# Altium PCB infant_temperature_1_solar.PcbDoc
Units mm, origin at the board's own origin, x right, y up, seen from the top; angles counter-clockwise.
Board outline 25 x 25 mm, 2 copper layers (Top Layer, Bottom Layer), stack 0.097 mm thick; 74 components, 46 nets, 237 pads, 55 vias.
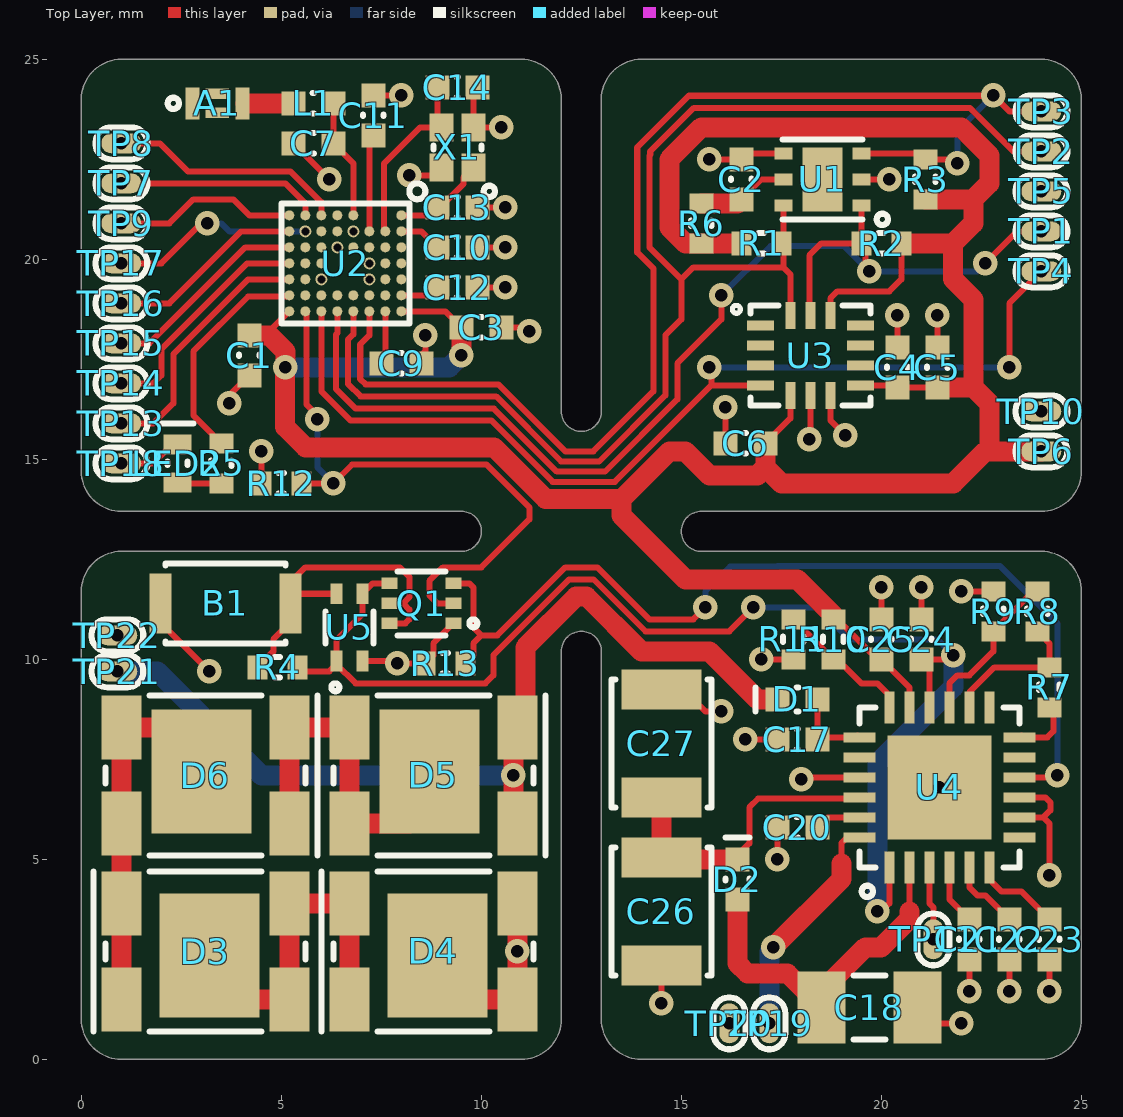
[diagram p0: Top Layer view]
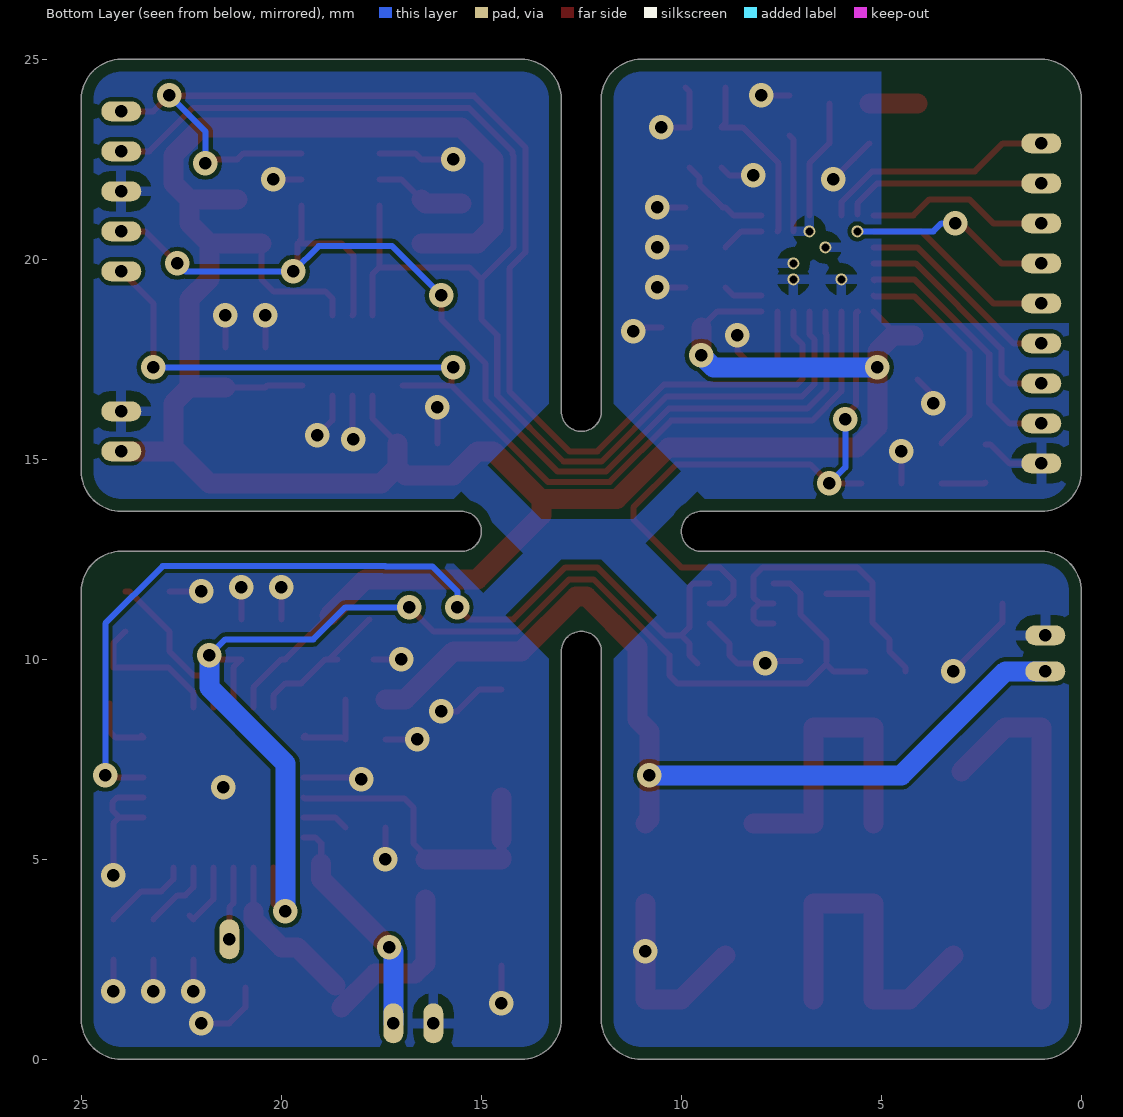
[diagram p1: Bottom Layer view, seen from below]
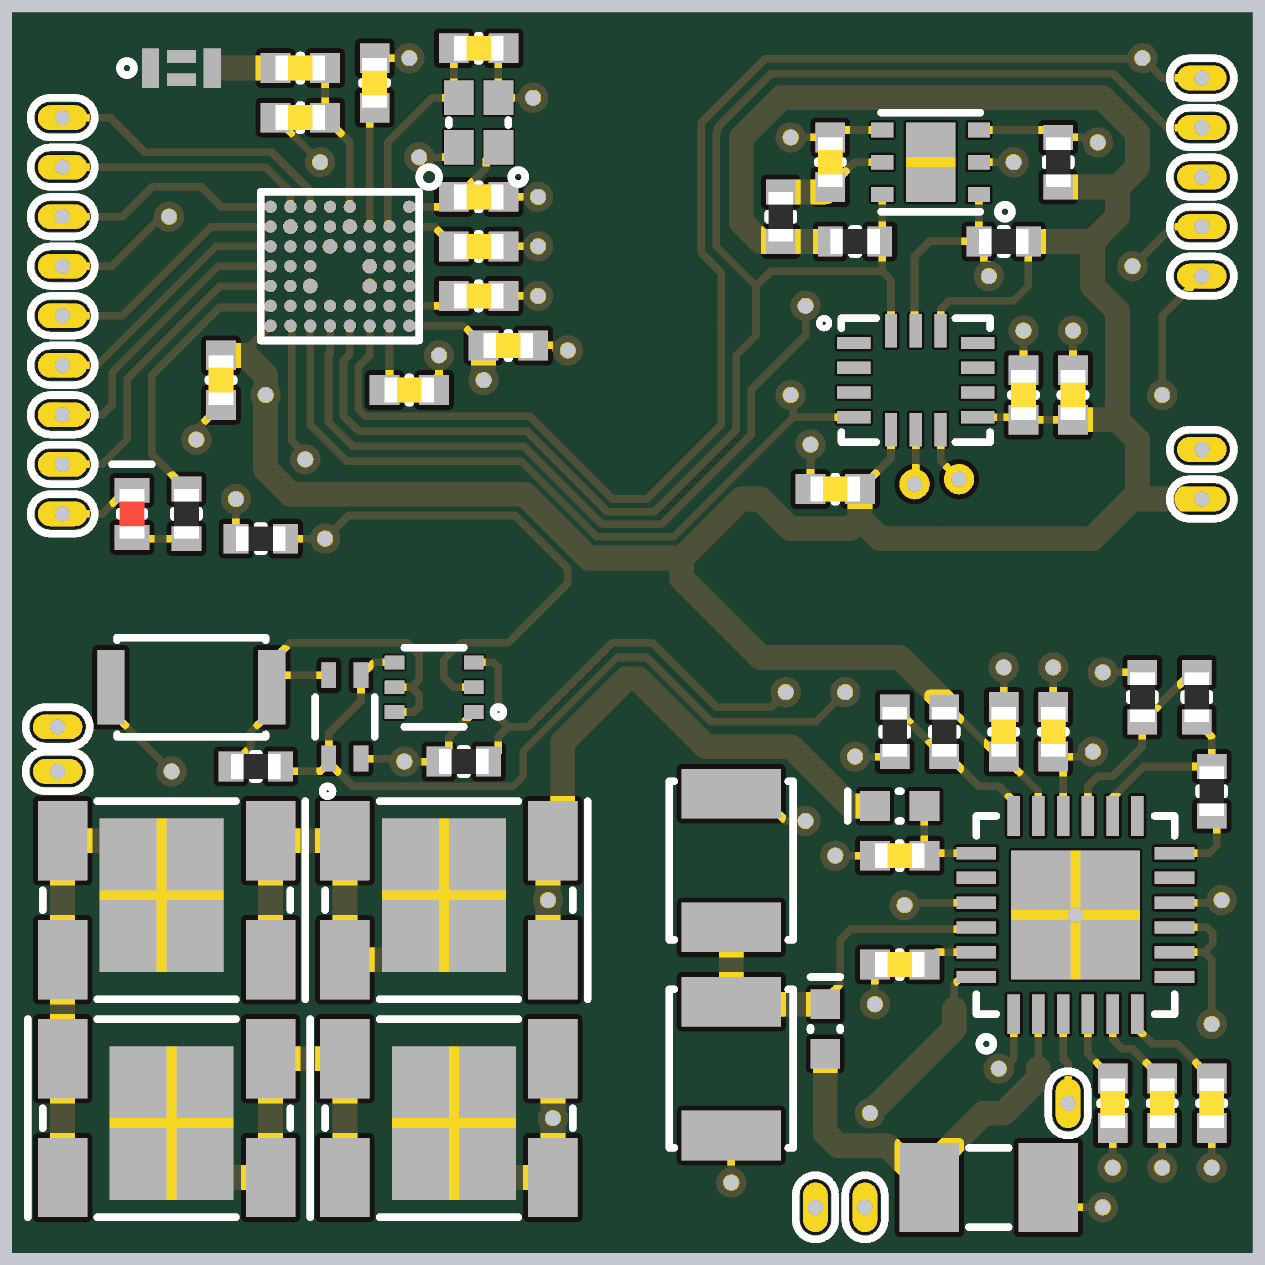
[diagram p2: 3D render of the assembled board from above, using the file's embedded part models]

## Layer stack, top to bottom
Top Solder: solder mask 0.0102, Solder Resist, Dk 3.5
Top Layer: signal copper 0.0356
Dielectric 1: dielectric 0.0254, polyimide, Dk 4.8
Bottom Layer: signal copper 0.0356
Bottom Solder: solder mask 0.0102, Solder Resist, Dk 3.5

## Board outline
0,1 0,11.7 cw(c1,11.7) 1,12.7 9.5,12.7 ccw(c9.5,13.2) 9.5,13.7 1,13.7 cw(c1,14.7) 0,14.7 0,24 cw(c1,24) 1,25 11,25 cw(c11,24) 12,24 12,16.2 ccw(c12.5,16.2) 13,16.2 13,24 cw(c14,24) 14,25 24,25 cw(c24,24) 25,24 25,14.7 cw(c24,14.7) 24,13.7 15.5,13.7 ccw(c15.5,13.2) 15.5,12.7 24,12.7 cw(c24,11.7) 25,11.7 25,1 cw(c24,1) 24,0 14,0 cw(c14,1) 13,1 13,10.2 ccw(c12.5,10.2) 12,10.2 12,1 cw(c11,1) 11,0 1,0 cw(c1,1)

## Design rules (kind name [scope] priority, off if disabled: settings)
BoardOutlineClearance [All] p1: gap=0.305 ignorepadtopadclearanceinfootprint=FALSE
Clearance [All] p1: gap=0.102 ignorepadtopadclearanceinfootprint=FALSE
MinimumSolderMaskSliver [All] p1: minsoldermaskwidth=0.127
PlaneConnect [All] p1: pad.planeconnectstyle=Relief pad.reliefexpansion=0.508 pad.reliefentries=4 pad.reliefconductorwidth=0.254 pad.reliefairgap=0.254 via.planeconnectstyle=Direct via.reliefexpansion=0.508 via.reliefentries=4 via.reliefconductorwidth=0.254 via.reliefairgap=0.254
PolygonConnect [All] p1: thpad.connectstyle=Relief thpad.reliefconductorwidth=0.254 thpad.reliefentries=4 thpad.polygonreliefangle="90 Angle" thpad.airgapwidth=0.254 smdpad.connectstyle=Relief smdpad.reliefconductorwidth=0.254 smdpad.reliefentries=4 smdpad.polygonreliefangle="90 Angle" smdpad.airgapwidth=0.254 via.connectstyle=Direct via.reliefconductorwidth=0.254 via.reliefentries=4 via.polygonreliefangle="90 Angle" via.airgapwidth=0.254
RoomDefinition infant_temperature_solar_power_1 [InComponentClass('infant_temperature_solar_power_1')] p1: confinementstyle=ConfineIn formatcopy=TRUE lockcomponents=FALSE outline -85,-79.3 -34.2,-79.3 -34.2,-53.9 -85,-53.9
RoomDefinition infant_temperature_solar_1 [InComponentClass('infant_temperature_solar_1')] p2: confinementstyle=ConfineIn formatcopy=TRUE lockcomponents=FALSE outline -85,-79.3 -34.2,-79.3 -34.2,-53.9 -85,-53.9
RoutingVias [All] p1: holewidth=0.711 width=1.27 viastyle="Through Hole" minholewidth=0.2 minwidth=0.4 maxholewidth=0.711 maxwidth=1.27
SilkToSolderMaskClearance [IsPad] p1: minsilkscreentomaskgap=0 clearancetoexposedcopper=TRUE
SolderMaskExpansion [All] p1: expansion=0.102
Width [All] p1: maxlimit=0.5 minlimit=0.102 preferedwidth=0.152
27 further rules are at their usual default settings.

## Classes and differential pairs
component class infant_temperature_solar_1: A1 C1 C2 C3 C4 C5 C6 C7 C9 C10 C11 C12 C13 C14 L1 LED2 R1 R2 R3 R5 R6 TP1 TP2 TP3 TP4 TP5 TP6 TP7 TP8 TP9 TP10 TP13 TP14 TP15 TP16 TP17 TP18 U1 U2 U3 X1
component class infant_temperature_solar_power_1: B1 C17 C18 C20 C21 C22 C23 C24 C25 C26 C27 D1 D2 D3 D4 D5 D6 Q1 R4 R7 R8 R9 R10 R11 R12 R13 TP11 TP19 TP20 TP21 TP22 U4 U5

## Components (designator, comment, footprint, x,y, rotation, side; value= is the part's Value field where it differs from the comment)
A1 ".Designator" ANT016008LCS 3.4,23.9 r0 top
B1 ".Designator" KXT3_BUTTON 3.6,11.4 r0 top
C1 ".Designator" C0402 4.2,17.6 r270 top value=100nF
C2 ".Designator" C0402 16.5,22 r90 top value=100nF
C3 ".Designator" C0402 10,18.3 r0 top value=4.7uF
C4 ".Designator" C0402 20.4,17.3 r90 top value=100nF
C5 ".Designator" C0402 21.4,17.3 r90 top value=1uF
C6 ".Designator" C0402 16.6,15.4 r180 top value=100nF
C7 ".Designator" C0402 5.8,22.9 r180 top value=1.0pF
C9 ".Designator" C0402 8,17.4 r0 top value=100nF
C10 ".Designator" C0402 9.4,20.3 r0 top value=100pF
C11 ".Designator" C0402 7.3,23.6 r90 top value=100pF
C12 ".Designator" C0402 9.4,19.3 r0 top value=1uF
C13 ".Designator" C0402 9.4,21.3 r180 top value=4pF
C14 ".Designator" C0402 9.4,24.3 r180 top value=4pF
C17 ".Designator" C0402 17.9,8 r180 top value=10uF
C18 ".Designator" C1206 19.7,1.3 r0 top value=68uF
C20 ".Designator" C0402 17.9,5.8 r180 top value=1uF
C21 ".Designator" C0402 22.2,3 r270 top value=330pF
C22 ".Designator" C0402 23.2,3 r270 top value=330pF
C23 ".Designator" C0402 24.2,3 r270 top value=150pF
C24 ".Designator" C0402 21,10.5 r90 top value=1uF
C25 ".Designator" C0402 20,10.5 r90 top value=1nF
C26 ".Designator" CPH3225A-2K 14.5,3.7 r90 top value=11mF
C27 ".Designator" CPH3225A-2K 14.5,7.9 r270 top value=11mF
D1 ".Designator" D0402 17.9,9 r0 top
D2 ".Designator" D0402 16.4,4.5 r270 top
D3 ".Designator" VEMD5060X01 3.1,2.7 r0 top
D4 ".Designator" VEMD5060X01 8.8,2.7 r0 top
D5 ".Designator" VEMD5060X01 8.8,7.1 r180 top
D6 ".Designator" VEMD5060X01 3.1,7.1 r180 top
L1 ".Designator" L0402 5.8,23.9 r180 top value=3.3nH
LED2 ".Designator" LED_0402 2.4,14.9 r90 top
Q1 ".Designator" SSMini6-F3-B 8.5,11.4 r90 top
R1 ".Designator" R0402 17,20.4 r0 top value=4K99
R2 ".Designator" R0402 20,20.4 r180 top value=4K99
R3 ".Designator" R0402 21.1,22 r90 top value=100K
R4 ".Designator" R0402 4.9,9.8 r0 top value=1M
R5 ".Designator" R0402 3.5,14.9 r270 top value=100
R6 ".Designator" R0402 15.5,20.9 r90 top value=499
R7 ".Designator" R0402 24.2,9.3 r270 top value=1M
R8 ".Designator" R0402 23.9,11.2 r270 top value=226K
R9 ".Designator" R0402 22.8,11.2 r270 top value=1M15
R10 ".Designator" R0402 18.8,10.5 r90 top value=750K
R11 ".Designator" R0402 17.8,10.5 r90 top value=1M
R12 ".Designator" R0402 5,14.4 r0 top value=1M
R13 ".Designator" R0402 9.1,9.9 r0 top value=1M
TP1 ".Designator" TP_32AWG_1X0.5MM_ROUND 24,20.7 r0 top
TP2 ".Designator" TP_32AWG_1X0.5MM_ROUND 24,22.7 r0 top
TP3 ".Designator" TP_32AWG_1X0.5MM_ROUND 24,23.7 r0 top
TP4 ".Designator" TP_32AWG_1X0.5MM_ROUND 24,19.7 r0 top
TP5 ".Designator" TP_32AWG_1X0.5MM_ROUND 24,21.7 r0 top
TP6 ".Designator" TP_32AWG_1X0.5MM_ROUND 24,15.2 r0 top
TP7 ".Designator" TP_32AWG_1X0.5MM_ROUND 1,21.9 r0 top
TP8 ".Designator" TP_32AWG_1X0.5MM_ROUND 1,22.9 r0 top
TP9 ".Designator" TP_32AWG_1X0.5MM_ROUND 1,20.9 r0 top
TP10 ".Designator" TP_32AWG_1X0.5MM_ROUND 24,16.2 r0 top
TP11 "Not A Part" TP_32AWG_1X0.5MM_ROUND 21.3,3 r90 top
TP13 ".Designator" TP_32AWG_1X0.5MM_ROUND 1,15.9 r0 top
TP14 ".Designator" TP_32AWG_1X0.5MM_ROUND 1,16.9 r0 top
TP15 ".Designator" TP_32AWG_1X0.5MM_ROUND 1,17.9 r0 top
TP16 ".Designator" TP_32AWG_1X0.5MM_ROUND 1,18.9 r0 top
TP17 ".Designator" TP_32AWG_1X0.5MM_ROUND 1,19.9 r0 top
TP18 ".Designator" TP_32AWG_1X0.5MM_ROUND 1,14.9 r0 top
TP19 ".Designator" TP_32AWG_1X0.5MM_ROUND 17.2,0.9 r90 top
TP20 ".Designator" TP_32AWG_1X0.5MM_ROUND 16.2,0.9 r90 top
TP21 ".Designator" TP_32AWG_1X0.5MM_ROUND 0.9,9.7 r180 top
TP22 ".Designator" TP_32AWG_1X0.5MM_ROUND 0.9,10.6 r0 top
U1 ".Designator" WSON-6_PAD 18.525,22 r180 top
U2 ".Designator" XFBGA-50 6.6,19.9 r270 top
U3 ".Designator" LGA-14 18.225,17.6 r0 top
U4 ".Designator" VQFN-24_PAD 21.45,6.8 r90 top
U5 ".Designator" SNT-4A 6.7,10.8 r0 top
X1 ".Designator" CRYSTAL_1MM6_X_1MM2 9.4,22.8 r90 top

## Footprints (in the part's own frame and the unit in brackets; to place one, negate y for a bottom-side part, rotate by r counter-clockwise, add the part's x,y. Pads: shape width x height; smd on the part's side, far side on the other; paste and mask are expansions set on the pad)
ANT016008LCS [mm] "1.6 x 0.8 x 0.4mm chip antenna"
  rect 0.35x0.8 smd mask-0.035: 1(-0.625,0) 4(0.625,0)
  rect 0.58x0.26 smd mask+0: 2-3(0,0.235) 5-6(0,-0.235)
  silkscreen extent -1.24,-0.14 -0.96,0.14, body extent -0.8,-0.4 0.8,0.4, height 0.4
C0402 [mm]
  rect 0.6x0.6 smd: 1(-0.5,0) 2(0.5,0)
  silkscreen extent -0.02,-0.25 0.02,0.25, body extent -0.5,-0.25 0.5,0.25, height 0.55
C1206 [mm] "Chip Capacitor; Body 3.2 x 1.8 mm (LxW typ)"
  rect 1.2x1.8 smd: 1(-1.2,0) 2(1.2,0)
  silkscreen extent -0.4,-0.8 0.4,0.8, body extent -1.6,-0.8 1.6,0.8, height 1
CPH3225A-2K [mm] "11mF (EDLC) Supercapacitor 3.3V 1210 (3225 Metric)"
  rect 1x2 smd: 1(-1.35,0) 2(1.35,0)
  silkscreen extent -1.6,-1.25 1.6,1.25, body extent -1.6,-1.25 1.6,1.25, height 0.9
CRYSTAL_1MM6_X_1MM2 [mm] "1.6 x 1.2 x 0.35mm 4-pin crystal"
  rect 0.7x0.6 smd mask+0.036: 1(-0.5,-0.4) 2(0.5,-0.4) 3(0.5,0.4) 4(-0.5,0.4)
  silkscreen extent -1.24,-0.94 0.05,0.6, body extent -0.8,-0.6 0.8,0.6, height 0.35
D0402 [mm] "1.0x0.6x0.5mm for RB751S-40L2"
  rect 0.6x0.6 smd mask+0.09: 1(0.5,0) 2(-0.5,0)
  silkscreen extent -1.05,-0.3 0.03,0.3, body extent -0.5,-0.3 0.5,0.3, height 0.5
KXT3_BUTTON [mm] "For KXT3 line of tactile buttons"
  rect 0.55x1.5 smd: 1(-1.625,0) 2(1.625,0)
  silkscreen extent -1.5,-1 1.5,1, body extent -1.5,-1 1.5,1, height 0.6
L0402 [mm]
  rect 0.6x0.6 smd: 1(-0.5,0) 2(0.5,0)
  silkscreen extent -0.02,-0.25 0.02,0.25, body extent -0.5,-0.25 0.5,0.25, height 0.55
LED_0402 [mm] "0402 w/ LED mark"
  rect 0.5x0.7 smd: 1(0.475,0) 2(-0.475,0)
  silkscreen extent -0.04,-0.4 1,0.4, body extent -0.5,-0.25 0.5,0.25, height 0.35
LGA-14 [mm] "for BMI160, LSM6DS3"
  rect 0.675x0.25 smd mask+0.05: 1(-1.25,0.75) 2(-1.25,0.25) 3(-1.25,-0.25) 4(-1.25,-0.75) 8(1.25,-0.75) 9(1.25,-0.25) 10(1.25,0.25) 11(1.25,0.75)
  rect 0.25x0.675 smd mask+0.05: 5(-0.5,-1) 6(0,-1) 7(0.5,-1) 12(0.5,1) 13(0,1) 14(-0.5,1)
  silkscreen extent -1.95,-1.25 1.5,1.25, body extent -1.5,-1.25 1.5,1.25, height 0.9
R0402 [mm]
  rect 0.5x0.6 smd: 1(-0.5,0) 2(0.5,0)
  silkscreen extent -0.06,-0.25 0.06,0.25, body extent -0.5,-0.25 0.5,0.25, height 0.35
SNT-4A [mm] "4-pin 1.2x1.6x0.5mm for S5712 series Hall Effect Sensors"
  rect 0.3x0.52 smd: 1(-0.325,-0.84) 2(0.325,-0.84) 3(0.325,0.84) 4(-0.325,0.84)
  silkscreen extent -0.6,-1.6 0.6,0.4, body extent -0.6,-0.8 0.6,0.8, height 0.5
SSMini6-F3-B [mm] "1.6 x 1.2mm SMD for NMOS + PMOS array"
  rect 0.28x0.4 smd mask+0.04: 1(-0.5,-0.8) 2(0,-0.8) 3(0.5,-0.8) 4(0.5,0.8) 5(0,0.8) 6(-0.5,0.8)
  silkscreen extent -0.8,-1.4 0.8,0.6
TP_32AWG_1X0.5MM_ROUND [mm] "12mil hole+1 x 0.5mm round pad for 32AWG wire"
  oval 1x0.5 hole 0.305 mask+0.05: 1(0,0)
  silkscreen extent -0.65,-0.4 0.65,0.4
VEMD5060X01 [mm] "5x4x0.9 photodiode/solar cell"
  rect 1x1.6 smd: A(-2.1,-1.2) A(-2.1,1.2) C(2.1,-1.2) C(2.1,1.2)
  rect 2.5x3.1 smd paste-1.25 mask+0: C(0.1,-0.1)
  silkscreen extent -2.8,-2 2.5,2, body extent -2.5,-2 2.5,2, height 0.9
VQFN-24_PAD [mm] "4x4x0.9mm"
  rect 0.8x0.25 smd mask+0.061: 1(-2,1.25) 2(-2,0.75) 3(-2,0.25) 4(-2,-0.25) 5(-2,-0.75) 6(-2,-1.25) 13(2,-1.25) 14(2,-0.75) 15(2,-0.25) 16(2,0.25) 17(2,0.75) 18(2,1.25)
  rect 0.25x0.8 smd mask+0.061: 7(-1.25,-2) 8(-0.75,-2) 9(-0.25,-2) 10(0.25,-2) 11(0.75,-2) 12(1.25,-2) 19(1.25,2) 20(0.75,2) 21(0.25,2) 22(-0.25,2) 23(-0.75,2) 24(-1.25,2)
  rect 2.6x2.6 smd paste-1.3 mask+0.05: PAD(0,0)
  silkscreen extent -2.74,-2 2,2, body extent -2,-2 2,2, height 0.9
WSON-6_PAD [mm] "2x2mm 6pin + power pad"
  rect 0.45x0.3 smd mask+0.05: 1(-0.975,0.65) 2(-0.975,0) 3(-0.975,-0.65) 4(0.975,-0.65) 5(0.975,0) 6(0.975,0.65)
  rect 1x1.6 smd paste-0.5 mask+0.05: PAD(0,0)
  silkscreen extent -1.64,-1 1,1.14, body extent -1.05,-1.05 1.05,1.05, height 0.8
XFBGA-50 [mm] "3x4mm for NRF52832"
  round 0.25 smd paste+0 mask+0.01: A1(-1.2,1.4) A2(-0.8,1.4) A3(-0.4,1.4) A4(0,1.4) A5(0.4,1.4) A6(0.8,1.4) A7(1.2,1.4) B2(-0.8,1) B3(-0.4,1) B4(0,1) B5(0.4,1) B6(0.8,1) B7(1.2,1) C2(-0.8,0.6) C3(-0.4,0.6) C6(0.8,0.6) C7(1.2,0.6) D1(-1.2,0.2) D3(-0.4,0.2) D6(0.8,0.2) D7(1.2,0.2) E1(-1.2,-0.2) E2(-0.8,-0.2) E6(0.8,-0.2) E7(1.2,-0.2) F1(-1.2,-0.6) F2(-0.8,-0.6) F3(-0.4,-0.6) F4(0,-0.6) F6(0.8,-0.6) F7(1.2,-0.6) G1(-1.2,-1) G3(-0.4,-1) G4(0,-1) G5(0.4,-1) G6(0.8,-1) G7(1.2,-1) H1(-1.2,-1.4) H2(-0.8,-1.4) H3(-0.4,-1.4) H4(0,-1.4) H5(0.4,-1.4) H6(0.8,-1.4) H7(1.2,-1.4)
  round 0.3 hole 0.2 paste+0 mask+0.01: C4(0,0.6) C5(0.4,0.6) D2(-0.8,0.2) E3(-0.4,-0.2) F5(0.4,-0.6) G2(-0.8,-1)
  silkscreen extent -2,-1.6 1.5,2, body extent -1.5,-1.6 1.5,1.6, height 0.4

## Part data
A1: library part ANT016008LCS2442MA2, "ANTENNA 2.4GHZ SMD", DigikeyPartNumber=445-172405CT-ND, Manufacturer=TDK, MfgPartNumber=ANT016008LCS2442MA2
B1: library part KXT3_button, "SWITCH TACTILE SPST-NO 0.02A 15V", DigikeyPartNumber=CKN10779CT-ND, Manufacturer=C&K, MfgPartNumber=KXT331LHS
C1 C2 C4 C6 C9: library part CAP, "Nonpolarized capacitor", DigikeyPartNumber=1276-1739-1-ND, Manufacturer=Samsung, MfgPartNumber=CL05F104ZA5NNNC, Package=C0402, VoltageRating=25V
C3: library part CAP, "Nonpolarized capacitor", DigikeyPartNumber=490-14306-1-ND, Manufacturer=Murata, MfgPartNumber=GRM155R61A475MEAAD, Package=C0402, VoltageRating=10V
C5 C12 C20 C24: library part CAP, "Nonpolarized capacitor", DigikeyPartNumber=587-3245-1-ND, Manufacturer="Taiyo Yuden", MfgPartNumber=TMK105BJ105MV-F, Package=C0402, VoltageRating=25V
C7: library part CAP, "Nonpolarized capacitor", DigikeyPartNumber=490-11362-1-ND, Manufacturer=Murata, MfgPartNumber=GRM1555C1E1R0BA01D, Package=C0402, VoltageRating=25V
C10 C11: library part CAP, "Nonpolarized capacitor", DigikeyPartNumber=311-3807-1-ND, Manufacturer=Yageo, MfgPartNumber=CC0402KRX7R8BB101, Package=C0402, VoltageRating=25V
C13 C14: library part CAP, "Nonpolarized capacitor", DigikeyPartNumber=490-5873-1-ND, Manufacturer=Murata, MfgPartNumber=GRM1555C1H4R0CA01D, Package=C0402, VoltageRating=50V, ClassName=MCU
C17: library part CAP, "Nonpolarized capacitor", DigikeyPartNumber=490-13211-1-ND, Manufacturer=Murata, MfgPartNumber=GRJ155R60J106ME11D, Package=C0402, VoltageRating=6.3V
C18: library part CAP, "Nonpolarized capacitor", DigikeyPartNumber=445-11687-1-ND, Manufacturer="TDK Corporation", MfgPartNumber=C3216JB1A686M160AC, Package=C1206, VoltageRating=10V
C21 C22: library part CAP, "Nonpolarized capacitor", DigikeyPartNumber=399-15320-1-ND, Manufacturer=KEMET, MfgPartNumber=C0402C331J3GAC7867, Package=C0402, VoltageRating=25V
C23: library part CAP, "Nonpolarized capacitor", DigikeyPartNumber=490-6171-1-ND, Manufacturer=Murata, MfgPartNumber=GRM1555C1E151JA01D, Package=C0402, VoltageRating=25V
C25: library part CAP, "Nonpolarized capacitor", DigikeyPartNumber=311-1712-1-ND, Manufacturer=Yageo, MfgPartNumber=CC0402KRX7R8BB102, Package=C0402, VoltageRating=25V
C26 C27: library part CPH3225A-2K, "11mF (EDLC) Supercapacitor 3.3V 1210 (3225 Metric)", DigikeyPartNumber=728-1067-1-ND, Manufacturer="Seiko Instruments", Package=1210, VoltageRating=3.3V, MfgPartNumber=CPH3225A-2K
D1 D2: library part RB751S, "Diode Schottky 40V 30mA Surface Mount DFN1006-2", DigikeyPartNumber=RB751S-40L2-TPMSCT-ND, Manufacturer="Micro Commercial Co", MfgPartNumber=RB751S-40L2-TP
D3 D4 D5 D6: library part VEMD5060X01, "PHOTODIODE PIN 820NM SMD", DigikeyPartNumber=VEMD5060X01CT-ND, Manufacturer=Vishay, MfgPartNumber=VEMD5060X01
L1: library part IND, "Inductor", DigikeyPartNumber=490-7641-1-ND, Manufacturer=Murata, MfgPartNumber=LQW15AN3N3B80D, Package=L0402
LED2: library part LED, "LED", Color=Green, DigikeyPartNumber=754-2121-1-ND, Manufacturer=Kingbright, MfgPartNumber=APHHS1005LCGCK, Package=LED_0402
Q1: library part FG6943010R, "MOSFET N/P-CH 30V 0.1A SSMINI6", DigikeyPartNumber=FG6943010RCT-ND, Manufacturer="Panasonic Electronic Components", MfgPartNumber=FG6943010R
R1 R2: library part RES, "Resistor", DigikeyPartNumber=P4.99KLCT-ND, Manufacturer=Panasonic, MfgPartNumber=ERJ-2RKF4991X, Tolerance=1%
R3: library part RES, "Resistor", DigikeyPartNumber=YAG2307CT-ND, Manufacturer=Yageo, MfgPartNumber=RT0402FRE07100KL, Tolerance=1%
R4 R11 R12 R13: library part RES, "Resistor", DigikeyPartNumber=311-1.00MLRCT-ND, Manufacturer=Yageo, MfgPartNumber=RC0402FR-071ML, Tolerance=1%
R5: library part RES, "Resistor", DigikeyPartNumber=311-100DGCT-ND, Manufacturer=Yageo, MfgPartNumber=RC0100FR-07100RL, Tolerance=1%
R6: library part RES, "Resistor", DigikeyPartNumber=P499LCT-ND, Manufacturer=Panasonic, MfgPartNumber=ERJ-2RKF4990X, Tolerance=1%
R7: library part RES, "Resistor", DigikeyPartNumber=Lookup, MfgPartNumber=RC0402FR-071ML, Tolerance=1%, Manufacturer=Lookup
R8: library part RES, "Resistor", DigikeyPartNumber=311-226KLRCT-ND, Manufacturer=Yageo, MfgPartNumber=RC0402FR-07226KL, Tolerance=1%
R9: library part RES, "Resistor", DigikeyPartNumber=541-1.15MLCT-ND, Manufacturer="Vishay Dale", MfgPartNumber=CRCW04021M15FKED, Tolerance=1%
R10: library part RES, "Resistor", DigikeyPartNumber=Lookup, Tolerance=1%, Manufacturer=Lookup, MfgPartNumber=Lookup
TP1 TP2 TP3 TP4 TP5 TP6 TP7 TP8 TP9 TP10 TP11 TP13 TP14 TP15 TP16 TP17 TP18 TP19 TP20 TP21 TP22: library part TP_32AWG, "0.305mm (12mil) hole for 32AWG wire. No BOM item."
U1: library part TMP116, "Temperature Sensor Digital, Local -55°C ~ 125°C 16 b 6-WSON (2x2)", DigikeyPartNumber=296-48306-1-ND, Manufacturer="Texas Instruments", MfgPartNumber=TMP116NAIDRVR
U2: library part NRF52832_BGA, "Bluetooth Low Energy 50-XFBGA", DigikeyPartNumber=1490-1066-1-ND, Manufacturer="Nordic Semiconductor ASA", MfgPartNumber=NRF52832-CIAA-R7
U3: library part BMI160_ALTERNATE, "IMU ACCEL/GYRO I2C/SPI 14LGA", DigikeyPartNumber=828-1057-1-ND, Manufacturer=Bosch, MfgPartNumber=BMI160
U4: library part S6AE103A, "IC PMIC ENERGY HARVESTING 24QFN", DigikeyPartNumber=428-3873-1-ND, Manufacturer=Cypress, MfgPartNumber=S6AE103A0DGN1B200
U5: library part S-5712ANSL2-I4T1U, "Digital Switch Unipolar Switch Open Drain Hall Effect SNT-4A", DigikeyPartNumber=1662-1617-1-ND, Manufacturer=ABLIC, MfgPartNumber=S-5712ANSL2-I4T1U
X1: library part CRYSTAL_32MHz, "CRYSTAL 32.0000MHZ 8PF SMD", DigikeyPartNumber=US3200005ZCT-ND, Manufacturer="Diodes Inc.", MfgPartNumber=US3200005Z, Package=CRYSTAL_1MM6_X_1MM2

## Via types
v1: diameter 0.61, hole 0.305, Top Layer to Bottom Layer, tented both sides, 53 vias
v2: diameter 0.61, hole 0.305, Top Layer to Bottom Layer, 2 vias

## Nets (pads, with @x,y where several pads share a name; then routed paths per layer and width w, separated by ;. In a path a pad name is that pad's centre, name@x,y a point inside that pad or via, vN(x,y) a via of type N, cw(c..) or ccw(c..) an arc to the next point about the centre after c; other vN are vias at no path point)
+2V0: C1.1 C3.1 C4.1 C5.1 C6.1 C25.1 R1.1 R2.1 R3.1 R6.1 R10.2 TP6.1 U2.A7 U2.H7 U3.5 U3.8 U3.12 U4.17 | length 72.2
  Top Layer w0.152: 4.8,18.3 U2.H7 ; U2.A7 9.1,18.7 C3.1 ; C6.1 17.725,16.025 U3.5 ; U3.12 18.725,19.025 18.9,19.2 20.2,19.2 20.5,19.5 R2.1 ; R10.2@18.8,11.1 19.9,10 C25.1 20.7,9.3 U4.17 ; U3.8 20.35,16.85 C4.1 C5.1
  Top Layer w0.5: C1.1 4.7,18.1 5.1,17.7 v1(5.1,17.3) 5.095,17.295 5.095,15.808 5.608,15.295 10.322,15.295 11.607,14.01 13.485,14.01 13.5,13.995 ; v1@9.5,17.8 C3.1 ; R1.1 R6.1 15.1,20.4 14.7,20.8 14.7,22.5 15.5,23.3 22,23.3 22.7,22.6 22.7,21.9 22.3,21.5 ; C6.1 17.1,14.8 ; R10.2@18.8,11.1 17.9,12 15.1,12 13.5,13.6 13.5,13.995 ; R2.1 21.8,20.4 ; R3.1 22.3,21.5 ; C5.1 22.3,16.8 ; 22.7,15.2 22.7,16.4 22.3,16.8 ; TP6.1 22.6,15.2 21.8,14.4 17.5,14.4 17.1,14.8 ; 13.5,13.995 14.705,15.2 15.1,15.2 15.7,14.6 16.9,14.6 17.1,14.8 ; 21.8,20.4 21.795,20.395 21.795,19.505 22.3,19 22.3,16.8 ; 21.8,20.4 22.3,20.9 22.3,21.5
  Bottom Layer w0.5: v1(5.1,17.3) 9.2,17.3 v1(9.5,17.6)
ANT: A1.4 L1.2 | length 1.2
  Top Layer w0.5: A1.4@4.1,23.9 L1.2
ENA_LDO: Q1.3 R13.2 U4.10 | length 24.5
  Top Layer w0.152: Q1.3 9.7,11.9 9.8,11.8 9.8,10.8 10,10.6 ; R13.2 9.8,10.1 9.8,10.4 10,10.6 ; v1(15.6,11.3) 15.3,11 14.2,11 12.9,12.3 12.1,12.3 10.4,10.6 10,10.6 ; U4.10 24.35,7.05 v1(24.4,7.1)
  Bottom Layer w0.152: v1(15.6,11.3) 15.6,11.7 16.219,12.319 17.4,12.319 ; 17.4,12.331 22.969,12.331 24.4,10.9 v1(24.4,7.1)
ENA_LDO_MCU: Q1.2 R12.2 U2.G7 | length 15.6
  Top Layer w0.152: R12.2 v1(6.3,14.4) 6.767,14.867 10.133,14.867 11.2,13.8 11.2,13.5 10,12.3 9.04,12.3 8.7,11.96 8.7,11.6 8.9,11.4 Q1.2 ; U2.G7@5.59,18.69 U2.G7 5.631,18.669 5.631,16.369 6,16 v1(5.9,16)
  Bottom Layer w0.152: v1(5.9,16) 5.9,14.8 v1(6.3,14.4)
GND: B1.1 C1.2 C2.2 C3.2 C4.2 C5.2 C6.2 C7.2 C9.2 C10.2 C11.2 C12.2 C13.1 C14.1 C17.2 C18.2 C20.2 C21.2 C22.2 C23.2 C24.2 C25.2 C26.1 C27.1 D4.C LED2.1 Q1.1 R9.1 R11.1 R12.1 R13.1 TP5.1 TP10.1 TP18.1 TP20.1 TP22.1 U1.2 U1.4 U2.C4 U2.C5 U2.D2 U2.E3 U2.F5 U3.6 U3.7 U4.8 U4.9 U4.21 U4.PAD U5.2 X1.2 X1.4 | length 45.2
  Top Layer w0.152: TP18.1 1.8,14.9 2.275,15.375 LED2.1 ; B1.1 1.975,10.925 v1(3.2,9.7) ; v1@3.7,16.6 C1.2@4.1,17 ; R12.1 v1(4.5,15.2) v1@4.5,15.3 ; C7.2 5.672,22.528 v1(6.2,22) ; U5.2 7.84,9.96 v1(7.9,9.9) R13.1 8.8,10.1 8.8,10.4 Q1.1 ; C11.2 v1(8,24.1) ; v1(8.2,22.1) 8.8,22.1 X1.4 ; C9.2@8.3,17.4 8.6,17.7 v1(8.6,18.1) ; C12.2 v1(10.6,19.3) ; C10.2 v1(10.6,20.3) ; C13.1 v1(10.6,21.3) ; C14.1 9.8,24.2 X1.2 v1(10.5,23.3) ; C3.2 v1@11.2,18.3 ; v1(14.5,1.4) C26.1 ; C27.1 15.05,9.25 15.6,8.7 v1(16,8.7) ; v1(15.7,22.5) C2.2 16.65,22.65 U1.4 ; C6.2 v1(16.1,16.3) ; v1(16.6,8) C17.2 ; v1(17,10) R11.1@17.7,10 ; v1(17.4,5) C20.2 ; v1(18,7) 18.05,7.05 U4.21 ; v2(18.2,15.5) 18.225,15.525 U3.6 ; U3.7 18.725,15.975 v2(19.1,15.6) ; U1.2 v1(20.2,22) ; C25.2 v1(20,11.8) ; C4.2 v1(20.4,18.6) ; C18.2@20.9,1.8 C18.2 21.3,0.9 v1(22,0.9) ; C24.2 v1(21,11.8) ; C5.2 v1(21.4,18.6) ; v1(22,11.7) R9.1 ; v1@22.2,1.6 C21.2 ; v1@23.2,1.6 C22.2 ; U4.8 24.05,6.05 ; U4.9 24.1,6.55 24.225,6.425 24.225,6.225 24.05,6.05 ; v1(24.2,1.7) C23.2 ; v1(24.2,4.6) 24.2,5.9 24.05,6.05
  Top Layer w0.5: D4.C@8.9,2.6 10,1.5 10.9,1.5 v1(10.9,2.7) D4.C@10.9,3.9
  other v1: 22.2,1.7 23.2,1.7 21.45,6.8 3.7,16.4 11.2,18.2
I2C_SCK: R2.2 TP1.1 U1.1 U2.E7 U3.13 | length 29
  Top Layer w0.152: U2.E7 6.4,18.155 6.369,18.124 6.369,16.756 6.856,16.269 10.313,16.269 11.89,14.692 13.092,14.692 14.9,16.5 14.9,17.4 16,18.5 v1(16,19.1) ; U3.13 18.2,18.625 18.2,20.1 18.5,20.4 19.6,20.4 19.6,19.8 v1(19.7,19.7) ; U1.1 19.5,20.5 R2.2@19.55,20.45 ; v1(22.6,19.9) 23.4,20.7 TP1.1
  Bottom Layer w0.152: v1(16,19.1) 17.231,20.331 19.069,20.331 v1(19.7,19.7) 22.4,19.7 v1(22.6,19.9)
I2C_SDA: R1.2 TP2.1 U1.6 U2.D7 U3.14 | length 34.1
  Top Layer w0.152: U2.D7 6.8,18.128 6.671,17.999 6.671,16.881 6.981,16.571 10.369,16.571 11.995,14.946 12.946,14.946 14.602,16.602 14.602,18.102 15,18.5 15,19.5 ; U1.6 17.55,19.8 ; U3.14 17.725,19.625 17.55,19.8 ; TP2.1 23.3,22.7 22.213,23.787 15.313,23.787 14.224,22.697 14.224,22.624 14.2,22.6 14.2,20.3 15,19.5 ; 15,19.5 15.3,19.8 17.55,19.8
INT_IMU: TP4.1 U2.F7 U3.4 | length 25.7
  Top Layer w0.152: U2.F7 6,16.697 6.731,15.967 10.256,15.967 11.784,14.438 13.338,14.438 15.75,16.85 ; v1(15.7,17.3) 15.75,17.25 15.75,16.85 ; U3.4 15.75,16.85 ; v1(23.2,17.3) 23.2,18.9 TP4.1
  Bottom Layer w0.152: v1(15.7,17.3) v1(23.2,17.3) v1@23.2,17.2
INT_TMP: R3.2 TP3.1 U1.3 U2.C7 | length 32
  Top Layer w0.152: U2.C7 7.2,18.1 6.974,17.874 6.974,17.006 7.106,16.874 10.426,16.874 12.1,15.2 12.8,15.2 14.3,16.7 14.3,19.772 14.075,19.998 13.898,20.175 13.898,22.799 15.188,24.089 v1@22.517,24.089 ; U1.3 20.95,22.65 R3.2 22,22.5 v1(21.9,22.4) ; v1(22.8,24.1) 23.2,23.7 TP3.1
  Bottom Layer w0.152: v1(21.9,22.4) 21.9,23.2 v1(22.8,24.1)
LED1_G: R5.1 U2.H6 | length 5.6
  Top Layer w0.152: R5.1 2.8,16.1 2.8,17.7 4.167,19.067 5.167,19.067 U2.H6
NetB1_2: B1.2 Q1.5 Q1.6 R4.1 U5.4 | length 9
  Top Layer w0.152: R4.1@4.4,9.7 R4.1 4.8,10.2 4.8,10.5 5.225,10.925 B1.2 B1.2@5.225,11.6 ; U5.4 5.265,11.64 B1.2@5.225,11.6 ; Q1.6 8.1,10.9 8.2,11 8.2,11.245 8.045,11.4 ; Q1.5 8.045,11.4 ; B1.2@5.225,11.6 5.225,11.925 5.6,12.3 7.96,12.3 8.2,12.06 8.2,11.555 8.045,11.4
NetC2_1: C2.1 R6.2 U1.5 | length 2.3
  Top Layer w0.152: C2.1 17,22 U1.5
  Top Layer w0.5: R6.2 16.4,21.4 C2.1
NetC7_1: C7.1 L1.1 U2.D1 | length 3
  Top Layer w0.152: L1.1 C7.1 6.8,22.4 U2.D1
NetC9_1: C9.1 U2.B7 | length 1.3
  Top Layer w0.152: C9.1 7.6,17.5 U2.B7
NetC10_1: C10.1 U2.A2 | length 1.1
  Top Layer w0.152: U2.A2 8.5,20.7 C10.1
NetC11_1: C11.1 U2.C2 | length 2.4
  Top Layer w0.152: U2.C2 7.2,23 C11.1
NetC12_1: C12.1 U2.A6 | length 1
  Top Layer w0.152: U2.A6 8.7,19.1 C12.1
NetC13_2: C13.2 U2.A1 X1.1 | length 2.4
  Top Layer w0.152: U2.A1 8.7,21.1 C13.2 8.97,21.3 9.55,21.88 9.55,22.05 X1.1
NetC14_2: C14.2 U2.B2 X1.3 | length 4.6
  Top Layer w0.152: U2.B2 7.569,20.731 7.569,22.4 8.469,23.3 X1.3 8.9,23.4 C14.2
NetC17_1: C17.1 D1.1 U4.19 | length 2.1
  Top Layer w0.152: D1.1 C17.1 18.45,8.05 U4.19 U4.19@19.4,8.1
NetC21_1: C21.1 U4.4 | length 1.6
  Top Layer w0.152: U4.4 21.7,4 C21.1 C21.1@22.3,3.6
NetC22_1: C22.1 U4.5 | length 1.8
  Top Layer w0.152: U4.5 22.2,4.3 22.4,4.1 22.6,4.1 C22.1
NetC23_1: C23.1 U4.6 | length 2.2
  Top Layer w0.152: U4.6 22.7,4.5 23,4.2 23.5,4.2 C23.1
NetD3_A: D3.A D6.C | length 9.3
  Top Layer w0.5: D3.A@1,1.5 1,3.9 1,5.9 1,8.3 1.9,8.3 D6.C@3,7.2
NetD3_C: D3.C D4.A | length 8.8
  Top Layer w0.5: D3.C@3.2,2.6 4.3,1.5 5.2,1.5 5.2,3.9 6.7,3.9 D4.A@6.7,1.5
NetD5_C: D5.C D6.A | length 7.8
  Top Layer w0.5: D6.A@5.2,5.9 5.2,8.3 6.7,8.3 6.7,5.9 D5.C@8.2,5.9
NetLED2_2: LED2.2 R5.2 | length 1.1
  Top Layer w0.152: LED2.2 2.425,14.4 R5.2
NetR7_1: R7.1 R8.2 U4.14 | length 3.7
  Top Layer w0.152: U4.14 22.2,9.172 22.828,9.8 R7.1 24.2,10.4 R8.2
NetR7_2: R7.2 U4.12 | length 1.7
  Top Layer w0.152: U4.12@23.5,8.1 U4.12 24.15,8.05 24.3,8.2 R7.2@24.3,8.9
NetR8_1: R8.1 R9.2 U4.15 | length 4
  Top Layer w0.152: U4.15 21.7,9.4 21.9,9.6 22.2,9.6 22.8,10.2 R9.2 23.8,11.7 R8.1
NetR10_1: R10.1 R11.2 U4.18 | length 3.7
  Top Layer w0.152: R11.2 R10.1 ; R10.1@18.6,10 18.9,10 19.5,9.4 19.9,9.4 20.2,9.1 U4.18
PRO_CLK: TP8.1 U2.F1 | length 5.9
  Top Layer w0.152: TP8.1 1.962,22.9 2.662,22.2 5.228,22.2 6,21.428 U2.F1
PRO_DIO: TP7.1 U2.G1 | length 5.1
  Top Layer w0.152: TP7.1 2.534,21.9 2.537,21.898 5.102,21.898 5.6,21.4 U2.G1@5.6,21.126
PRO_R\S\T\: TP9.1 U2.H1 | length 4.6
  Top Layer w0.152: TP9.1 2.2,20.9 2.8,21.5 3.8,21.5 4.2,21.1 U2.H1
TRACE_0: TP16.1 U2.H2 | length 4.9
  Top Layer w0.152: TP16.1 2.2,18.9 4,20.7 U2.H2
TRACE_1: TP15.1 U2.H3 | length 5.2
  Top Layer w0.152: TP15.1 1.7,17.9 4.1,20.3 U2.H3
TRACE_2: TP14.1 U2.H4 | length 5.8
  Top Layer w0.152: TP14.1 1.8,16.9 2,17.1 2,17.755 4.145,19.9 U2.H4
TRACE_3: TP13.1 U2.H5 | length 6.5
  Top Layer w0.152: TP13.1 1.8,15.9 2.302,16.402 2.302,17.63 4.172,19.5 U2.H5 U2.H5@5.167,19.467
TRACE_CLK: TP17.1 U2.G2 | length 5.1
  Top Layer w0.152: TP17.1 2,19.9 3,20.9 v1(3.15,20.9)
  Bottom Layer w0.152: v1(3.15,20.9) 3.5,20.9 3.7,20.7 U2.G2
VBAT: TP19.1 U4.24 | length 5.8
  Top Layer w0.152: 19.002,4.9 19.002,5.402 19.15,5.55 U4.24
  Top Layer w0.5: v1(17.3,2.8) 19.002,4.502 19.002,4.9
  Bottom Layer w0.5: TP19.1 17.2,2.7 v1(17.3,2.8)
VINT: C20.1 U4.23 | length 1.2
  Top Layer w0.152: C20.1 18.65,6.05 U4.23
VOUT1: C24.1 Q1.4 R4.2 U4.1 U4.16 U5.1 U5.3 | length 32.6
  Top Layer w0.152: R4.2@5.4,9.7 6.2,9.7 6.375,9.875 6.375,9.88 6.855,9.4 10.1,9.4 10.3,9.6 10.3,10.105 12.195,12 12.805,12 14.105,10.7 16.2,10.7 v1(16.8,11.3) ; U5.1 6.375,10.475 7.025,11.125 U5.3 7.285,11.9 Q1.4 ; v1@20,3.7 20.2,3.9 U4.1 ; U4.16 21.2,9.8 C24.1 21.7,10 v1(21.8,10.1)
  Bottom Layer w0.152: v1(16.8,11.3) 18.4,11.3 19.2,10.5 21.4,10.5 v1(21.8,10.1)
  Bottom Layer w0.5: v1(19.9,3.7) 19.9,7.4 21.8,9.3 v1(21.8,10.1)
VOUT2: TP11.1 U4.3 | length 2
  Top Layer w0.152: U4.3 21.2,3.9 21.3,3.8 TP11.1@21.3,2.8
VSOLAR: D1.2 D5.A TP21.1 | length 23.4
  Top Layer w0.5: D5.A@10.9,5.9 10.8,6 v1(10.8,7.1) 10.8,8.2 10.9,8.3 11.1,8.5 11.1,10.3 12.372,11.572 12.628,11.572 14,10.2 15.7,10.2 16.9,9 D1.2
  Bottom Layer w0.5: TP21.1 1.9,9.7 4.5,7.1 v1(10.8,7.1)
VSTORE1: C18.1 D2.1 U4.2 | length 8.2
  Top Layer w0.152: 20.7,3.7 U4.2
  Top Layer w0.5: D2.1 16.4,2.4 16.657,2.143 17.657,2.143 C18.1 ; C18.1@18.65,1.85 19.6,2.8 19.997,2.8 20.7,3.503 20.7,3.7
VSTORE2: C26.2 C27.2 D2.2 U4.22 | length 7.2
  Top Layer w0.152: D2.2@16.4,5.1 16.7,5.4 16.7,6.3 16.917,6.517 17.8,6.517 19.417,6.517 U4.22
  Top Layer w0.5: C26.2 14.5,5 D2.2 ; C26.2@14.5,5.501 C27.2
pads on no net: A1.1 A1.2-3 A1.5-6 U1.PAD U2.A3 U2.A4 U2.A5 U2.B3 U2.B4 U2.B5 U2.B6 U2.C3 U2.C6 U2.D3 U2.D6 U2.E1 U2.E2 U2.E6 U2.F2 U2.F3 U2.F4 U2.F6 U2.G3 U2.G4 U2.G5 U2.G6 U3.1 U3.2 U3.3 U3.9 U3.10 U3.11 U4.7 U4.11 U4.13 U4.20

## Polygon pours and split planes (outlines as drawn)
GND on Bottom Layer "GND_L02_P000" (solid, pour order 0): 15.5,14.2 15.8,13.9 16,13.7 25,13.7 25,25 13,25 13.003,16.697 14.85,14.85 13.5,13.5 11.2,13.5 10,14.7 12,16.7 12,25 5,25 5,18.4 0,18.4 0,13.7 9.1,13.7 9.6,14.2 10.9,12.9 9.85,11.85 9,12.7 0,12.7 0,0 12,0 12,9.7 10.6,11.1 12,12.5 13,12.5 14.4,11.1 13,9.7 13,0 25,0 25,12.7 16,12.7 14.95,11.65 13.95,12.65

## Silkscreen, mask and mechanical layers (free items; w line width, h text height)
Top Paste:
  circle w0.15: c6,19.5 r0.075
  circle w0.15: c5.6,20.7 r0.07
  circle w0.15: c6.4,20.3 r0.07
  circle w0.15: c6.8,20.7 r0.07
  circle w0.15: c7.2,19.9 r0.07
  circle w0.15: c7.2,19.5 r0.07
M1_Outline:
  the board outline again, w0.152
M2_Instructions:
  text "GM1 - BOARD OUTLINE / GM2 - INSTRUCTIONS / GM3 - ASSEMBLY  / GM6 - BOTTOM STIFFENER" at 31.9,39.9 h0.8
  text "INFANT_TEMPERATURE_1 / MARK STAMBAUGH / MSTAMBAUGH@UCSD.EDU / 25 X 25 MM / 2-LAYER / 1 MIL POLYIMIDE / 8 MIL VIAS / 4 MIL SPACE/TRACE / 1 OZ COPPER BOTH SIDES / 8 MIL VIA-IN-PAD FILLED (CONDUCTIVE) / BOTTOM STIFFENER 100UM POLYIMIDE / NO SILKSCREEN / GREEN SOLDERMASK / IMMERSION GOLD FINISH" at -0.4,32.7 h0.8
M4_Flex_Zones:
  lines w0.152: 9.9,12.9 12.8,15.8 ; 9.9,13.5 12.8,10.6 ; 12.2,10.6 15.1,13.5 ; 12.2,15.8 15.1,12.9 ; 13,16.2 15.5,13.7 ; 9.5,12.7 15.5,12.7 13,10.2 13,13.7 9.5,13.7 12,16.2 12,10.2 9.5,12.7
M6_Bottom_stiffener:
  the board outline again, w0.152

## Dimensions
0,25 to 25,25 on M2_Instructions
0,25 to 0,0 on M2_Instructions

## Text inside footprints (layer, text, board x,y; h text height)
Q1: M3_Assembly "1" at 8.9,10.8 h0.5 r90
U1: M3_Assembly "1" at 19.175,21.75 h0.5 r180
U2: M3_Assembly "1" at 7.1,21.05 h0.8 r270
U4: M3_Assembly "1" at 20.65,5.25 h0.8 r90
U5: M3_Assembly "1" at 6.3,10.3 h0.5